# EAGLE board CT_schematic (EAGLE 7.6.0)

Size 100 x 80 mm. Coordinates in mm from the lower left corner, seen from the top.
Outline: 0,0 100,0 100,80 0,80 0,0
Copper layers (1*16): Top 0.035mm / dielectric 1.5mm / Bottom 0.035mm
Design rules "default": minimum track width 10mil, minimum drill 24mil, track to track 8mil, track to pad 8mil, pad to pad 8mil, via to via 8mil, smd to smd 8mil, copper to edge 40mil, drill to drill 8mil, minimum pad ring 10mil, minimum via ring 8mil, stop-mask expansion 4mil, vias tented up to drill 0mil, thermal gap 10mil

## Footprints (pad centres in the part's own frame; a part is rotated, then mirrored left to right if it is on the bottom)
C0603 = smd 0.8 x 0.8: 1 -0.762,0; 2 0.762,0
C0402 = smd 0.5 x 0.5: 1 -0.508,0; 2 0.508,0
C1210 = smd 1.2 x 2.5: 1 -1.524,0; 2 1.524,0
C0805 = smd 1.2 x 1.3: 1 -1.016,0; 2 1.016,0
EXV-9B = smd 2.718 x 1.778: 1 -2.108,0; 2 2.108,0
EXV-9H = smd 3.505 x 1.676: 1 -2.857,0; 2 2.857,0
PJ-037B_PACKAGE = drill 3.7 square: 1 12,0 | drill 3.2 square: 2 6,0
R0603 = smd 0.8 x 0.8: 1 -0.762,0; 2 0.762,0
LQFP64 = smd 0.3 x 1.2: 1 -3.75,-5.75; 2 -3.25,-5.75; 3 -2.75,-5.75; 4 -2.25,-5.75; 5 -1.75,-5.75; 6 -1.25,-5.75; 7 -0.75,-5.75; 8 -0.25,-5.75; 9 0.25,-5.75; 10 0.75,-5.75; 11 1.25,-5.75; 12 1.75,-5.75; 13 2.25,-5.75; 14 2.75,-5.75; 15 3.25,-5.75; 16 3.75,-5.75; 33 3.75,5.75; 34 3.25,5.75; 35 2.75,5.75; 36 2.25,5.75; 37 1.75,5.75; 38 1.25,5.75; 39 0.75,5.75; 40 0.25,5.75; 41 -0.25,5.75; 42 -0.75,5.75; 43 -1.25,5.75; 44 -1.75,5.75; 45 -2.25,5.75; 46 -2.75,5.75; 47 -3.25,5.75; 48 -3.75,5.75 | smd 1.2 x 0.3: 17 5.75,-3.75; 18 5.75,-3.25; 19 5.75,-2.75; 20 5.75,-2.25; 21 5.75,-1.75; 22 5.75,-1.25; 23 5.75,-0.75; 24 5.75,-0.25; 25 5.75,0.25; 26 5.75,0.75; 27 5.75,1.25; 28 5.75,1.75; 29 5.75,2.25; 30 5.75,2.75; 31 5.75,3.25; 32 5.75,3.75; 49 -5.75,3.75; 50 -5.75,3.25; 51 -5.75,2.75; 52 -5.75,2.25; 53 -5.75,1.75; 54 -5.75,1.25; 55 -5.75,0.75; 56 -5.75,0.25; 57 -5.75,-0.25; 58 -5.75,-0.75; 59 -5.75,-1.25; 60 -5.75,-1.75; 61 -5.75,-2.25; 62 -5.75,-2.75; 63 -5.75,-3.25; 64 -5.75,-3.75
DFN-10 = smd 0.965 x 0.305: 1 -1.321,1; 2 -1.321,0.5; 3 -1.321,0; 4 -1.321,-0.5; 5 -1.321,-1; 6 1.321,-1; 7 1.321,-0.5; 8 1.321,0; 9 1.321,0.5; 10 1.321,1
TDFN-8/6MM = smd 0.3 x 0.75: 1 0,0; 2 0.5,0; 3 1,0; 4 1.5,0; 5 1.5,3; 6 1,3; 7 0.5,3; 8 0,3
SOIC-8 = smd 1.6 x 0.6: 1 -2.7,1.905 | smd 1.55 x 0.6: 2 -2.7,0.635; 3 -2.7,-0.635; 4 -2.7,-1.905; 5 2.7,-1.905; 6 2.7,-0.635; 7 2.7,0.635; 8 2.7,1.905
182-009-MALE = drill 1.194 pad 1.524 octagon: 1 -5.537,10.923; 2 -2.769,10.923; 3 0,10.923; 4 2.769,10.923; 5 5.537,10.923; 6 -4.153,8.08; 7 -1.384,8.08; 8 1.384,8.08; 9 4.153,8.08 | hole 3.048: -12.446,9.501; 12.446,9.501
MICRO_USB_AB = smd 0.4 x 1.35: 1 1.3,0.26; 2 0.65,0.26; 3 0,0.26; 4 -0.65,0.26; 5 -1.3,0.26 | drill 0.6 pad 0.95 long: 6 4.175,-2.54; 7 -4.175,-2.54 | drill 0.7 pad 1.1 long: 8 -2.225,0.46; 9 2.225,0.46
SOT143B = smd 1 x 0.7: 1 -0.75,-1 | smd 0.6 x 0.7: 2 0.95,-1; 3 0.95,1; 4 -0.95,1
QFN-28 = smd 0.813 x 0.305: 1 -2.451,1.5; 2 -2.451,1; 3 -2.451,0.5; 4 -2.451,0; 5 -2.451,-0.5; 6 -2.451,-1; 7 -2.451,-1.5; 15 2.451,-1.5; 16 2.451,-1; 17 2.451,-0.5; 18 2.451,0; 19 2.451,0.5; 20 2.451,1; 21 2.451,1.5 | smd 0.305 x 0.813: 8 -1.5,-2.451; 9 -1,-2.451; 10 -0.5,-2.451; 11 0,-2.451; 12 0.5,-2.451; 13 1,-2.451; 14 1.5,-2.451; 22 1.5,2.451; 23 1,2.451; 24 0.5,2.451; 25 0,2.451; 26 -0.5,2.451; 27 -1,2.451; 28 -1.5,2.451 | smd 3.607 x 3.607: 29 0,0
SJ-43515TS-SMT-TR = smd 2.2 x 3: 1 0.6,-7.4; 4 3.4,-7.4 | smd 3 x 3: 2 12.8,-7.4; 5 17,-3 | smd 2 x 3: 3 5.3,0; 6 2.5,0 | drill 1.8: P$7 4.5,-3.69; P$8 11.54,-3.69
ABLS-12.288MHZ-B4-T = smd 5.6 x 2.8: 1 -3.81,0; 2 5.69,0
ASEK = smd 1.4 x 1: 1 -1.1,-0.8; 2 1.1,-0.8; 3 1.1,0.8; 4 -1.1,0.8
ASFL1 = smd 1.7 x 1.5: 1 -1.27,-1.1; 2 1.27,-1.1; 3 1.27,1.1; 4 -1.27,1.1
LP2954 = smd 1.6 x 0.6: 1 -2.475,1.905 | smd 1.55 x 0.6: 2 -2.475,0.635; 3 -2.475,-0.635; 4 -2.475,-1.905; 5 2.475,-1.905; 6 2.475,-0.635; 7 2.475,0.635; 8 2.475,1.905
SON-6 = smd 0.55 x 0.3: 1 -0.355,0.5 | smd 0.52 x 0.3: 2 -0.37,0; 3 -0.37,-0.5; 4 0.37,-0.5; 5 0.37,0; 6 0.37,0.5
SW_4-1437565-2 = smd 1.4 x 2.1: 1 -2.23,4.55; 2 -2.23,-4.55; 3 2.23,4.55; 4 2.23,-4.55
LGM67K-G1J2-24-Z = smd 0.8 x 1.4: A -2,0; C 0,0
NC7SZ125M5X = smd 1.3 x 0.7: 1 -1.3,0.95; 2 -1.3,0; 3 -1.3,-0.95; 4 1.3,-0.95; 5 1.3,0.95

## Placement (x,y rotation side)
C1  1e-06  [C0603]  -63.5,76.2 0 top  (outside the outline)
C2  1e-07  [C0603]  -67.31,76.2 0 top  (outside the outline)
C3  1e-07  [C0603]  -71.12,76.2 0 top  (outside the outline)
C4  1e-07  [C0603]  -74.93,76.2 0 top  (outside the outline)
C5  1e-07  [C0603]  -78.74,76.2 0 top  (outside the outline)
C6  1e-07  [C0603]  -82.55,76.2 0 top  (outside the outline)
C7  4.7e-06  [C0603]  -59.69,76.2 0 top  (outside the outline)
C8  1e-07  [C0603]  -15.24,81.28 0 top  (outside the outline)
C9  1e-08  [C0603]  -19.05,81.28 0 top  (outside the outline)
C10  1e-06  [C0603]  -22.86,81.28 0 top  (outside the outline)
C11  1e-07  [C0402]  -80.01,81.28 0 top  (outside the outline)
C12  1e-07  [C0402]  -15.24,86.36 0 top  (outside the outline)
C13  1e-06  [C0603]  -26.67,81.28 0 top  (outside the outline)
C14  1e-07  [C0402]  -19.05,86.36 0 top  (outside the outline)
C15  1e-07  [C0402]  -22.86,86.36 0 top  (outside the outline)
C16  1e-08  [C0402]  -26.67,86.36 0 top  (outside the outline)
C17  1e-07  [C0402]  -30.48,86.36 0 top  (outside the outline)
C18  2.2e-05  [C1210]  -67.31,62.23 0 top  (outside the outline)
C19  2.2e-05  [C1210]  -73.66,62.23 0 top  (outside the outline)
C20  1e-09  [C0402]  -34.29,86.36 0 top  (outside the outline)
C21  1e-09  [C0402]  -38.1,86.36 0 top  (outside the outline)
C22  1e-07  [C0402]  -41.91,86.36 0 top  (outside the outline)
C23  1e-07  [C0402]  -45.72,86.36 0 top  (outside the outline)
C24  1e-07  [C0402]  -49.53,86.36 0 top  (outside the outline)
C25  1e-07  [C0402]  -53.34,86.36 0 top  (outside the outline)
C26  1e-07  [C0402]  -57.15,86.36 0 top  (outside the outline)
C27  1e-05  [C0805]  -39.37,69.85 0 top  (outside the outline)
C28  1e-05  [C0805]  -44.45,69.85 0 top  (outside the outline)
C29  1e-05  [C0805]  -49.53,69.85 0 top  (outside the outline)
C30  1e-05  [C0805]  -54.61,69.85 0 top  (outside the outline)
C31  1e-05  [C0805]  -59.69,69.85 0 top  (outside the outline)
C32  2.2e-11  [C0402]  -72.39,81.28 0 top  (outside the outline)
C33  2.2e-11  [C0402]  -76.2,81.28 0 top  (outside the outline)
C34  1e-08  [C0402]  -60.96,86.36 0 top  (outside the outline)
C35  1e-08  [C0402]  -64.77,86.36 0 top  (outside the outline)
C36  1e-06  [EXV-9B]  -16.51,69.85 0 top  (outside the outline)
C37  2.2e-06  [EXV-9B]  -25.4,69.85 0 top  (outside the outline)
C38  1e-07  [C0402]  -68.58,86.36 0 top  (outside the outline)
C39  0.0001  [EXV-9H]  -68.58,53.34 0 top  (outside the outline)
C40  0.0001  [EXV-9H]  -17.78,63.5 0 top  (outside the outline)
C41  1e-08  [C0402]  -72.39,86.36 0 top  (outside the outline)
J1  PJ-037B  [PJ-037B_PACKAGE]  -55.88,29.21 0 top  (outside the outline)
R2  1000.0  [R0603]  -30.48,81.28 0 top  (outside the outline)
R4  4700.0  [R0603]  -34.29,81.28 0 top  (outside the outline)
R5  2200.0  [R0603]  -38.1,81.28 0 top  (outside the outline)
R6  2200.0  [R0603]  -41.91,81.28 0 top  (outside the outline)
R7  2200.0  [R0603]  -45.72,81.28 0 top  (outside the outline)
R8  2200.0  [R0603]  -49.53,81.28 0 top  (outside the outline)
R9  10000.0  [R0603]  -30.48,76.2 0 top  (outside the outline)
R10  120.0  [R0603]  -53.34,81.28 0 top  (outside the outline)
R11  470000.0  [R0603]  -69.85,69.85 0 top  (outside the outline)
R12  47000.0  [R0603]  -35.56,76.2 0 top  (outside the outline)
R13  47000.0  [R0603]  -40.64,76.2 0 top  (outside the outline)
R14  47000.0  [R0603]  -45.72,76.2 0 top  (outside the outline)
R15  680.0  [R0603]  -57.15,81.28 0 top  (outside the outline)
R16  100000.0  [R0603]  -74.93,69.85 0 top  (outside the outline)
R17  100000.0  [R0603]  -80.01,69.85 0 top  (outside the outline)
R18  164658.62  [R0603]  -64.77,69.85 0 top  (outside the outline)
R19  100000.0  [R0603]  -15.24,76.2 0 top  (outside the outline)
R20  10000.0  [R0603]  -50.8,76.2 0 top  (outside the outline)
R21  10000.0  [R0603]  -55.88,76.2 0 top  (outside the outline)
R22  9100.0  [R0603]  -60.96,81.28 0 top  (outside the outline)
R23  680000.0  [R0603]  -20.32,76.2 0 top  (outside the outline)
R24  120000.0  [R0603]  -25.4,76.2 0 top  (outside the outline)
U1  STM32L476RGT6  [LQFP64]  -68.58,29.21 0 top  (outside the outline)
U2  MAG3110FCR1  [DFN-10]  -66.04,81.28 0 top  (outside the outline)
U3  24AA02T-I/MNY  [TDFN-8/6MM]  -55.88,40.64 0 top  (outside the outline)
U4  SN65HVD230D  [SOIC-8]  -21.59,54.61 0 top  (outside the outline)
U5  182-009-113R531  [182-009-MALE]  -36.83,6.35 0 top  (outside the outline)
U6  47590-0001  [MICRO_USB_AB]  -20.32,44.45 0 top  (outside the outline)
U7  prtr5v0u2ax  [SOT143B]  -24.13,91.44 0 top  (outside the outline)
U8  WM8731CLSEFL  [QFN-28]  -59.69,63.5 0 top  (outside the outline)
U9  SJ-43515TS-SMT-TR  [SJ-43515TS-SMT-TR]  -78.74,10.16 0 top  (outside the outline)
U10  SJ-43515TS-SMT-TR  [SJ-43515TS-SMT-TR]  -39.37,31.75 0 top  (outside the outline)
U11  ABLS-12.288MHZ-B4-T  [ABLS-12.288MHZ-B4-T]  -35.56,63.5 0 top  (outside the outline)
U12  ASEK-32.768KHz-ECST  [ASEK]  -59.69,53.34 0 top  (outside the outline)
U13  ASFL1-25MHZ-NCS  [ASFL1]  -39.37,53.34 0 top  (outside the outline)
U14  LP2954AIMX/NOPB  [LP2954]  -71.12,41.91 0 top  (outside the outline)
U15  TPS3895ADRYR  [SON-6]  -27.94,90.17 0 top  (outside the outline)
U16  4-1437565-2  [SW_4-1437565-2]  -40.64,43.18 0 top  (outside the outline)
U17  Q65110A2395  [LGM67K-G1J2-24-Z]  -46.99,62.23 0 top  (outside the outline)
U18  nc7sz125m5x  [NC7SZ125M5X]  -33.02,69.85 0 top  (outside the outline)

## Library data of the parts
C1-C41 J1 R2 R4-R24 U1-U18 = circuit_tree

## Nets
CLK_CRYSTAL_U8_1: C32.1 U8.1 U11.1
CLK_CRYSTAL_U8_2: C33.1 U8.2 U11.2
CLK_U1_3: U1.3 U12.3
CLK_U1_5: U1.5 U13.3
GND: C1.2 C2.2 C3.2 C4.2 C5.2 C6.2 C7.2 C8.2 C9.2 C10.2 C11.2 C12.2 C13.2 C14.2 C15.2 C16.2 C17.2 C21.2 C22.2 C23.2 C24.2 C25.2 C26.2 C27.2 C28.2 C29.2 C30.2 C31.2 C32.2 C33.2 C34.2 C35.2 C36.2 C37.2 C38.2 C39.2 C40.2 C41.2 J1.2 R2.2 R9.2 R11.2 R12.2 R13.2 R14.2 R19.2 R22.2 R24.2 U1.12 U1.18 U1.31 U1.47 U1.63 U2.5 U2.10 U3.4 U3.7 U4.2 U5.5 U6.5 U6.6 U6.7 U6.8 U6.9 U7.1 U8.4 U8.15 U8.19 U8.25 U8.26 U8.29 U9.1 U10.1 U12.2 U13.2 U14.4 U15.2 U17.C U18.1 U18.3
NET_U1_7: R4.1 U1.7 U18.4
NET_U1_29: R7.1 U1.29 U3.6
NET_U1_30: R8.1 U1.30 U3.5
NET_U1_54: U17.A
NET_U1_56: U16.3 U16.4
NET_U1_58: R5.1 U1.58 U2.7
NET_U1_59: R6.1 U1.59 U2.6
NET_U1_60: R9.1 U1.60
NET_U2_1: C11.1 U2.1
NET_U2_4: C14.1 U2.4
NET_U4_6: R10.2 U4.6
NET_U4_8: R11.1 U4.8
NET_U5_2: R10.2 U4.6 U5.2
NET_U5_3: R10.1 U4.7 U5.3
NET_U8_9: U8.9
NET_U8_20: C26.1 C31.1 U8.20
NET_U9_2: C19.1 R13.1 U9.2
NET_U9_5: C18.1 R12.1 U9.5
NET_U9_13: C18.2
NET_U9_14: C19.2
NET_U10_5: C20.1 C21.1 R14.1 R15.1 U10.5
NET_U10_21: R15.2
NET_U10_22: C20.2
NET_U14_3: R17.1 U14.3
NET_U14_5: R16.1 U14.5
NET_U14_7: R18.2 R19.1 U14.7
NET_U15_1: R21.1 R22.1 U15.1
NET_U15_3: R23.2 R24.1 U15.3
NET_U15_4: R20.1 U15.4 U18.2
NET_U16_1: R2.1 U16.1 U16.2
PROC_CAN1_RX: U1.61 U4.4
PROC_CAN1_TX: U1.62 U4.1
PROC_SAI1_FS_B: U1.20 U8.9 U8.11
PROC_SAI1_SCK_B: U1.55 U8.7
PROC_SAI1_SD_B: U1.57 U8.8
PROC_USB_OTG_FS_DM: U1.44 U6.2 U7.3
PROC_USB_OTG_FS_DP: U1.45 U6.3 U7.2
PROC_USB_OTG_FS_ID: U1.43 U6.4
PROC_USB_OTG_FS_VBUS: U1.42 U6.1 U7.4
VCC_S1_8V1: C36.1 C39.1 C40.1 J1.1 R17.2 U14.8
VCC_TIER1_3V3: C1.1 C2.1 C3.1 C4.1 C5.1 C6.1 C7.1 C8.1 C9.1 C10.1 C12.1 C13.1 C15.1 C16.1 C17.1 C22.1 C23.1 C24.1 C25.1 C27.1 C28.1 C29.1 C30.1 C34.1 C35.1 C37.1 C38.1 C41.1 R4.2 R5.2 R6.2 R7.2 R8.2 R16.2 R18.1 R20.2 R21.2 R23.1 U1.1 U1.13 U1.19 U1.32 U1.48 U1.64 U2.2 U2.8 U3.8 U4.3 U8.3 U8.5 U8.12 U8.18 U12.4 U13.4 U14.1 U15.6 U18.5

## Tracks (layer width: path | path; a pad name or v marks a point on that pad's centre or on a via)
CLK_CRYSTAL_U8_1  (2 unrouted)
CLK_CRYSTAL_U8_2  (2 unrouted)
CLK_U1_3  (1 unrouted)
CLK_U1_5  (1 unrouted)
GND  (79 unrouted)
NET_U1_7  (2 unrouted)
NET_U1_29  (2 unrouted)
NET_U1_30  (2 unrouted)
NET_U1_56  (1 unrouted)
NET_U1_58  (2 unrouted)
NET_U1_59  (2 unrouted)
NET_U1_60  (1 unrouted)
NET_U2_1  (1 unrouted)
NET_U2_4  (1 unrouted)
NET_U4_6  (1 unrouted)
NET_U4_8  (1 unrouted)
NET_U5_2  (2 unrouted)
NET_U5_3  (2 unrouted)
NET_U8_20  (2 unrouted)
NET_U9_2  (2 unrouted)
NET_U9_5  (2 unrouted)
NET_U10_5  (4 unrouted)
NET_U14_3  (1 unrouted)
NET_U14_5  (1 unrouted)
NET_U14_7  (2 unrouted)
NET_U15_1  (2 unrouted)
NET_U15_3  (2 unrouted)
NET_U15_4  (2 unrouted)
NET_U16_1  (2 unrouted)
PROC_CAN1_RX  (1 unrouted)
PROC_CAN1_TX  (1 unrouted)
PROC_SAI1_FS_B  (2 unrouted)
PROC_SAI1_SCK_B  (1 unrouted)
PROC_SAI1_SD_B  (1 unrouted)
PROC_USB_OTG_FS_DM  (2 unrouted)
PROC_USB_OTG_FS_DP  (2 unrouted)
PROC_USB_OTG_FS_ID  (1 unrouted)
PROC_USB_OTG_FS_VBUS  (2 unrouted)
VCC_S1_8V1  (5 unrouted)
VCC_TIER1_3V3  (56 unrouted)